# EAGLE board FPC_18pin1mm (EAGLE 9.5.0)
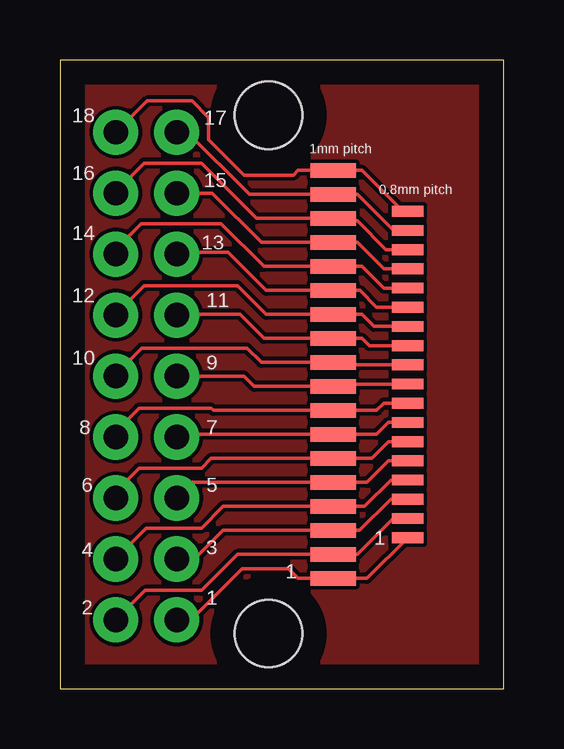
[diagram p0: board, top side]
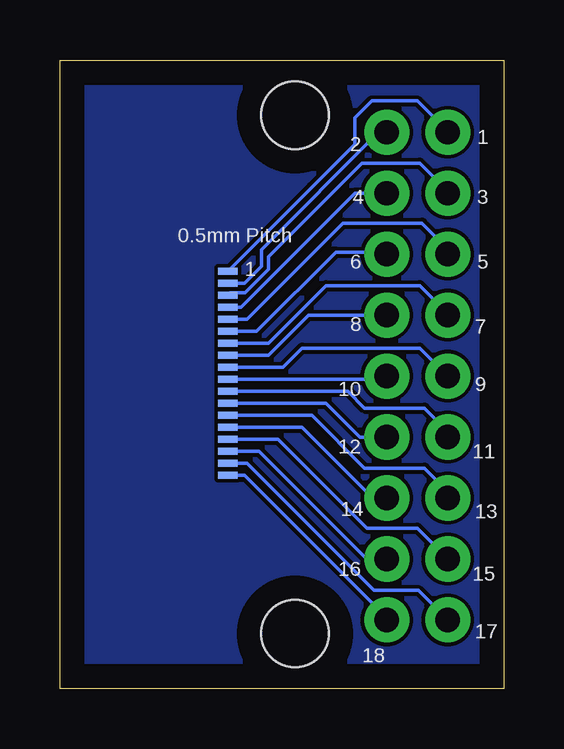
[diagram p1: board, bottom side, seen from below]

Size 18.5 x 26.2 mm. Coordinates in mm from the lower left corner, seen from the top.
Outline: 0,0 18.5,0 18.5,26.2 0,26.2 0,0
Copper layers (1*16): Top 0.035mm / dielectric 1.5mm / Bottom 0.035mm
Design rules "default": minimum track width 6mil, minimum drill 0.35mm, track to track 6mil, track to pad 6mil, pad to pad 6mil, via to via 6mil, smd to smd 6mil, copper to edge 40mil, drill to drill 6mil, minimum pad ring 10mil, minimum via ring 8mil, stop-mask expansion 4mil, vias tented up to drill 0mil, thermal gap 10mil
Holes 2.8 mm at 8.7,23.9 8.7,2.3

## Footprints (pad centres in the part's own frame; a part is rotated, then mirrored left to right if it is on the bottom)
522711879 = smd 1.9 x 0.6: P$1 -1,-8; P$2 -1,-7; P$3 -1,-6; P$4 -1,-5; P$5 -1,-4; P$6 -1,-3; P$7 -1,-2; P$8 -1,-1; P$9 -1,0; P$10 -1,1; P$11 -1,2; P$12 -1,3; P$13 -1,4; P$14 -1,5; P$15 -1,6; P$16 -1,7; P$17 -1,8; P$18 -1,9
CONN_18X2 = drill 1.016 pad 1.88: 1 -11.43,-1.27; 2 -11.43,1.27; 3 -8.89,-1.27; 4 -8.89,1.27; 5 -6.35,-1.27; 6 -6.35,1.27; 7 -3.81,-1.27; 8 -3.81,1.27; 9 -1.27,-1.27; 10 -1.27,1.27; 11 1.27,-1.27; 12 1.27,1.27; 13 3.81,-1.27; 14 3.81,1.27; 15 6.35,-1.27; 16 6.35,1.27; 17 8.89,-1.27; 18 8.89,1.27
18PIN0P8MM = smd 1.3 x 0.45: P$1 -0.8,-6.4; P$2 -0.8,-5.6; P$3 -0.8,-4.8; P$4 -0.8,-4; P$5 -0.8,-3.2; P$6 -0.8,-2.4; P$7 -0.8,-1.6; P$8 -0.8,-0.8; P$9 -0.8,0; P$10 -0.8,0.8; P$11 -0.8,1.6; P$12 -0.8,2.4; P$13 -0.8,3.2; P$14 -0.8,4; P$15 -0.8,4.8; P$16 -0.8,5.6; P$17 -0.8,6.4; P$18 -0.8,7.2
18PIN0P5MM = smd 0.8 x 0.3: P$1 -0.5,-5.5; P$2 -0.5,-5; P$3 -0.5,-4.5; P$4 -0.5,-4; P$5 -0.5,-3.5; P$6 -0.5,-3; P$7 -0.5,-2.5; P$8 -0.5,-2; P$9 -0.5,-1.5; P$10 -0.5,-1; P$11 -0.5,-0.5; P$12 -0.5,0; P$13 -0.5,0.5; P$14 -0.5,1; P$15 -0.5,1.5; P$16 -0.5,2; P$17 -0.5,2.5; P$18 -0.5,3

## Placement (x,y rotation side)
J1  [522711879]  12.4,12.6 0 top
J2  [CONN_18X2]  3.6,14.3 90 top
J3  [18PIN0P8MM]  15.3,12.7 0 top
J4  [18PIN0P5MM]  12,11.9 180 bottom

## Library data of the parts
J1 = 522711879
J2 = CONN_18X2
J3 = 18PIN0P8MM
J4 = 18PIN0P5MM

## Nets
N$1: J1.P$18 J2.18 J3.P$18 J4.P$1
N$2: J1.P$17 J2.17 J3.P$17 J4.P$2
N$3: J1.P$16 J2.16 J3.P$16 J4.P$3
N$4: J1.P$15 J2.15 J3.P$15 J4.P$4
N$5: J1.P$14 J2.14 J3.P$14 J4.P$5
N$6: J1.P$13 J2.13 J3.P$13 J4.P$6
N$7: J1.P$12 J2.12 J3.P$12 J4.P$7
N$8: J1.P$11 J2.11 J3.P$11 J4.P$8
N$9: J1.P$10 J2.10 J3.P$10 J4.P$9
N$10: J1.P$9 J2.9 J3.P$9 J4.P$10
N$11: J1.P$8 J2.8 J3.P$8 J4.P$11
N$12: J1.P$7 J2.7 J3.P$7 J4.P$12
N$13: J1.P$6 J2.6 J3.P$6 J4.P$13
N$14: J1.P$5 J2.5 J3.P$5 J4.P$14
N$15: J1.P$4 J2.4 J3.P$4 J4.P$15
N$16: J1.P$3 J2.3 J3.P$3 J4.P$16
N$17: J1.P$2 J2.2 J3.P$2 J4.P$17
N$18: J1.P$1 J2.1 J3.P$1 J4.P$18

## Tracks (layer width: path | path; a pad name or v marks a point on that pad's centre or on a via)
GND
  pour Top: 0,0 0,26.2 18.5,26.2 18.5,0
  pour Bottom: 0,0 0,26.2 18.5,26.2 18.5,0
N$1
  Top 0.152: J2.18 3.64,24.5 5.5,24.5 6.21,23.79 6.21,22.87 7.67,21.41 9.73,21.41 9.93,21.6 J1.P$18 12.6,21.6 14.3,19.9 J3.P$18
  Bottom 0.152: J4.P$1 8,20.9 6.2,22.7 6.2,23.8 5.5,24.5 3.6,24.5 2.33,23.23 J2.18
N$2
  Top 0.152: J2.17 5.31,23.19 7.9,20.6 J1.P$17 12.4,20.6 13.9,19.1 J3.P$17
  Bottom 0.152: J4.P$2 10.8,16.9 10.1,17.6 10.1,18.3 5.21,23.19 J2.17
N$3
  Top 0.152: J2.16 2.33,20.73 3.5,21.9 5.9,21.9 8.2,19.6 J1.P$16 11.5,19.5 12.4,19.5 13.6,18.3 J3.P$16
  Bottom 0.152: J4.P$3 11.4,16.5 10.77,16.5 9.79,17.47 9.79,18 5.9,21.9 3.5,21.9 2.33,20.73 J2.16
N$4
  Top 0.152: J2.15 6.35,20.65 8.4,18.6 J1.P$15 12.4,18.6 13.5,17.5 J3.P$15
  Bottom 0.152: J2.15 6.19,20.65 10.94,15.9 J4.P$4
N$5
  Top 0.152: J2.14 2.33,18.33 3.38,19.38 6.72,19.38 8.5,17.6 J1.P$14 12.6,17.6 13.5,16.7 J3.P$14
  Bottom 0.152: J2.14 2.33,18.33 3.4,19.4 6.7,19.4 10.7,15.4 J4.P$5
N$6
  Top 0.152: J2.13 4.96,18.2 7,18.2 8.6,16.6 J1.P$13 12.5,16.6 13.2,15.9 J3.P$13
  Bottom 0.152: J2.13 4.96,18.2 7,18.2 10.3,14.9 J4.P$6
N$7
  Top 0.152: J2.12 2.33,15.63 3.5,16.8 7.4,16.8 8.6,15.6 J1.P$12 12.6,15.6 13.1,15.1 J3.P$12
  Bottom 0.152: J2.12 2.33,15.63 3.5,16.8 7.4,16.8 9.8,14.4 J4.P$7
N$8
  Top 0.152: J2.11 4.9,15.6 7.5,15.6 8.5,14.6 J1.P$11 12.6,14.6 12.9,14.3 J3.P$11
  Bottom 0.152: J4.P$8 9.8,13.9 8.13,15.57 J2.11
N$9
  Top 0.152: J2.10 2.33,13.13 3.4,14.2 7.8,14.2 8.4,13.6 J1.P$10 11.5,13.5 J3.P$10
  Bottom 0.152: J4.P$9 9.2,13.4 8.4,14.2 3.5,14.2 J2.10
N$10
  Top 0.152: J2.9 7.67,13.03 8.1,12.6 J1.P$9 11.5,12.7 J3.P$9
  Bottom 0.152: J4.P$10 5,12.9 J2.9
N$11
  Top 0.152: J2.8 2.33,10.73 3.3,11.7 6.3,11.7 6.4,11.6 J1.P$8 13.2,11.6 13.5,11.9 J3.P$8
  Bottom 0.152: J4.P$11 6.5,12.4 5.8,11.7 3.3,11.7 2.33,10.73 J2.8
N$12
  Top 0.152: J2.7 4.98,10.6 J1.P$7 13.2,10.6 13.7,11.1 J3.P$7
  Bottom 0.152: J4.P$12 7.4,11.9 5.99,10.49 J2.7
N$13
  Top 0.152: J2.6 2.33,8.23 3.3,9.2 5.9,9.2 6.3,9.6 J1.P$6 13,9.6 13.7,10.3 J3.P$6
  Bottom 0.152: J4.P$13 8,11.4 5.8,9.2 3.3,9.2 2.33,8.23 J2.6
N$14
  Top 0.152: J2.5 5.52,8.6 J1.P$5 12.8,8.6 13.7,9.5 J3.P$5
  Bottom 0.152: J4.P$14 8.4,10.9 5.45,7.95 J2.5
N$15
  Top 0.152: J2.4 2.33,5.43 3.6,6.7 5.9,6.7 6.8,7.6 J1.P$4 12.7,7.6 13.8,8.7 J3.P$4
  Bottom 0.152: J4.P$15 9.4,10.4 5.7,6.7 3.6,6.7 2.33,5.43 J2.4
N$16
  Top 0.152: J2.3 5.61,5.41 6.8,6.6 J1.P$3 12.49,6.6 13.79,7.9 J3.P$3
  Bottom 0.152: J4.P$16 10.2,9.9 5.7,5.4 J2.3
N$17
  Top 0.152: J2.2 3.56,4.1 5.9,4.1 7.4,5.6 J1.P$2 12.4,5.6 13.9,7.1 J3.P$2
  Bottom 0.152: J4.P$17 10.7,9.4 5.4,4.1 3.56,4.1 J2.2
N$18
  Top 0.152: J2.1 5.47,2.87 7.59,4.99 9.53,4.99 9.93,4.6 J1.P$1 12.8,4.6 J3.P$1
  Bottom 0.152: J4.P$18 10.8,8.9 4.87,2.97 J2.1

## Text on the board
tPlace: 18 | 17 | 1mm pitch | 16 | 15 | 0.8mm pitch | 14 | 13 | 12 | 11 | 10 | 9 | 8 | 7 | 6 | 5 | 4 | 3 | 1 | 1 | 1 | 2
bPlace: 1 | 2 | 3 | 4 | 0.5mm Pitch | 5 | 6 | 1 | 7 | 8 | 9 | 10 | 11 | 12 | 13 | 14 | 16 | 15 | 17 | 18